# Altium PCB make-urine-white.PcbDoc
Units mm, origin at the board's own origin, x right, y up, seen from the top; angles counter-clockwise.
Board outline 38 x 33 mm, 2 copper layers (Top Layer, Bottom Layer); 31 components, 19 nets, 103 pads, 75 vias.
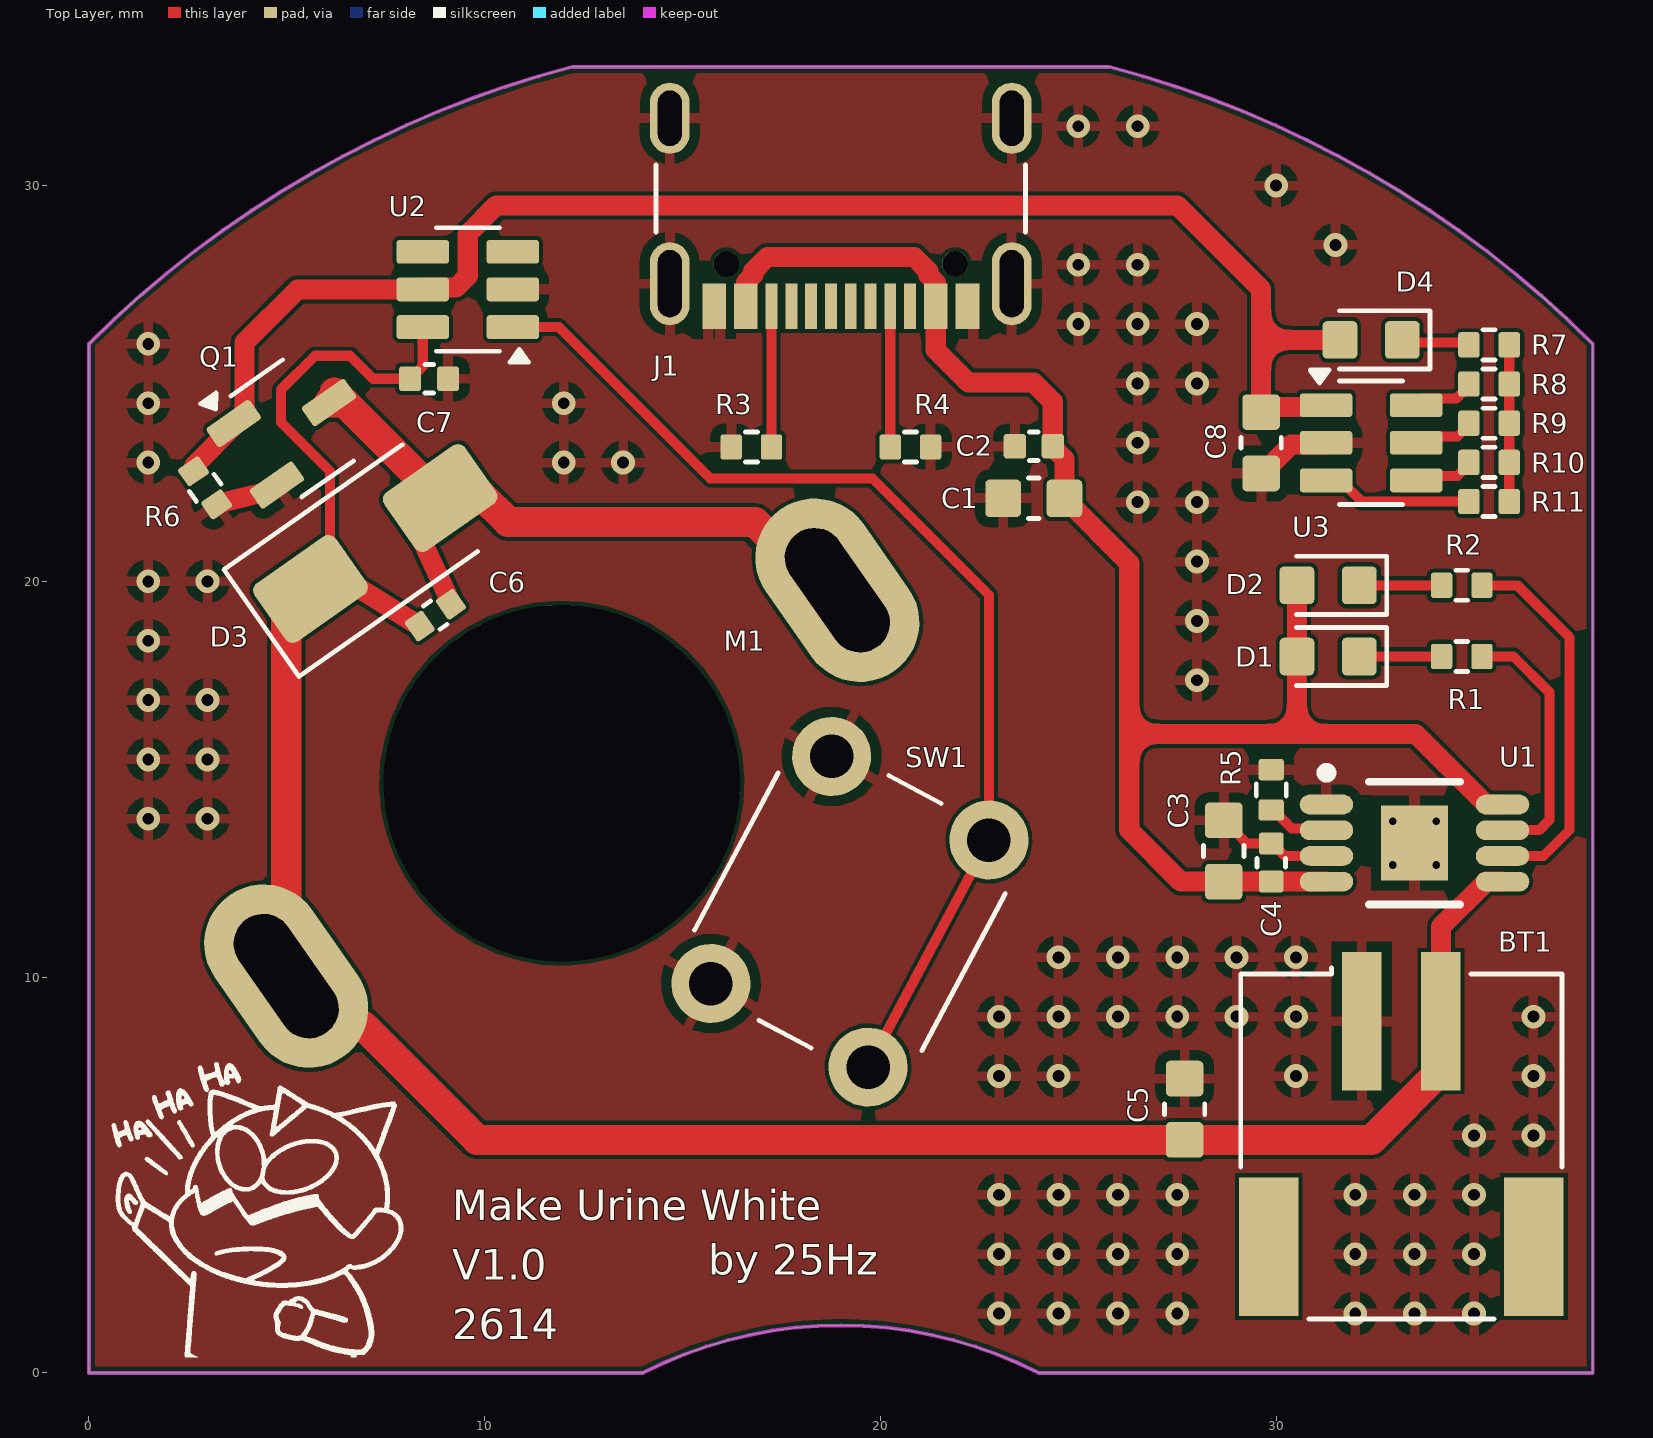
[diagram p0: Top Layer view]
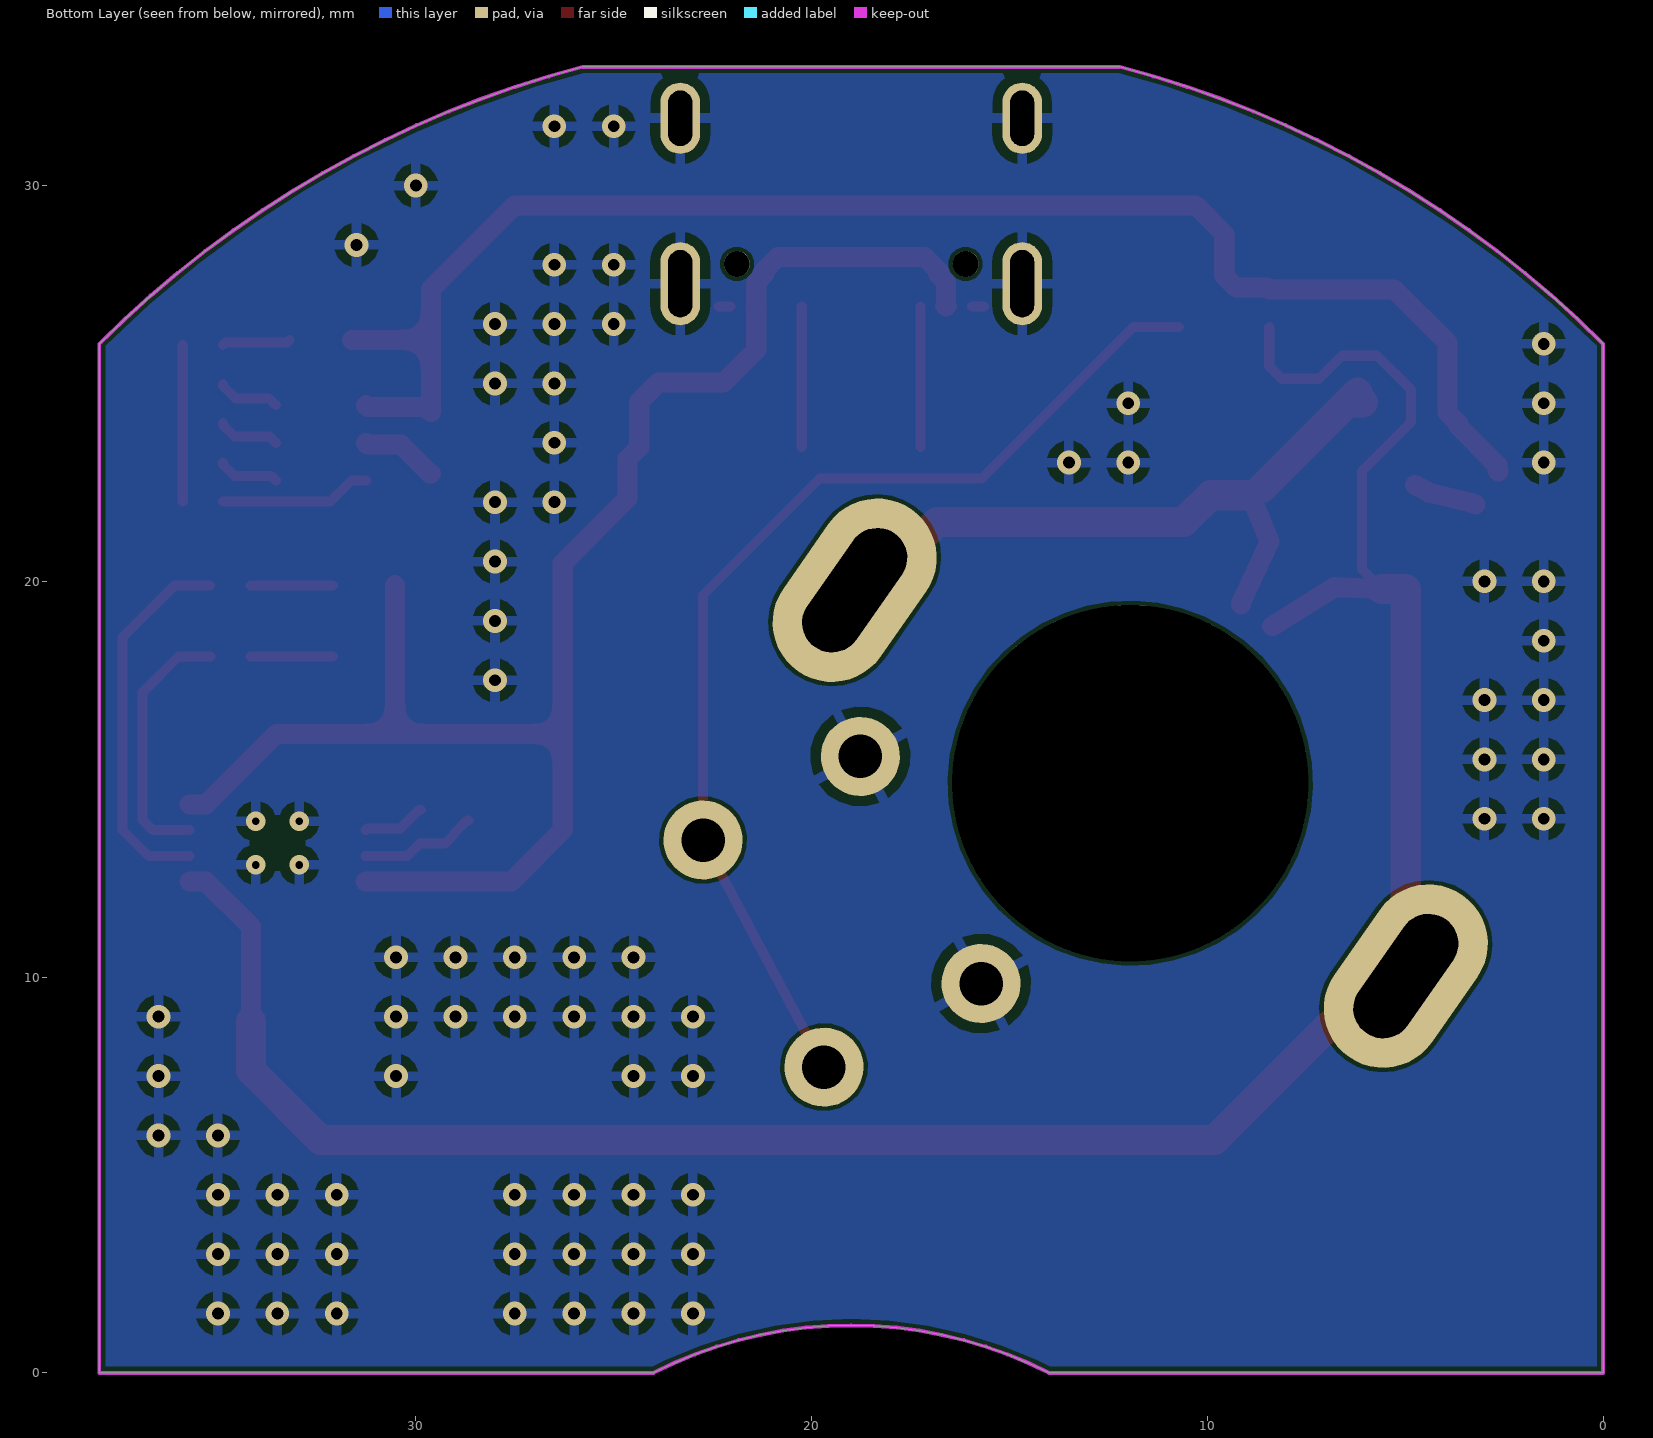
[diagram p1: Bottom Layer view, seen from below]
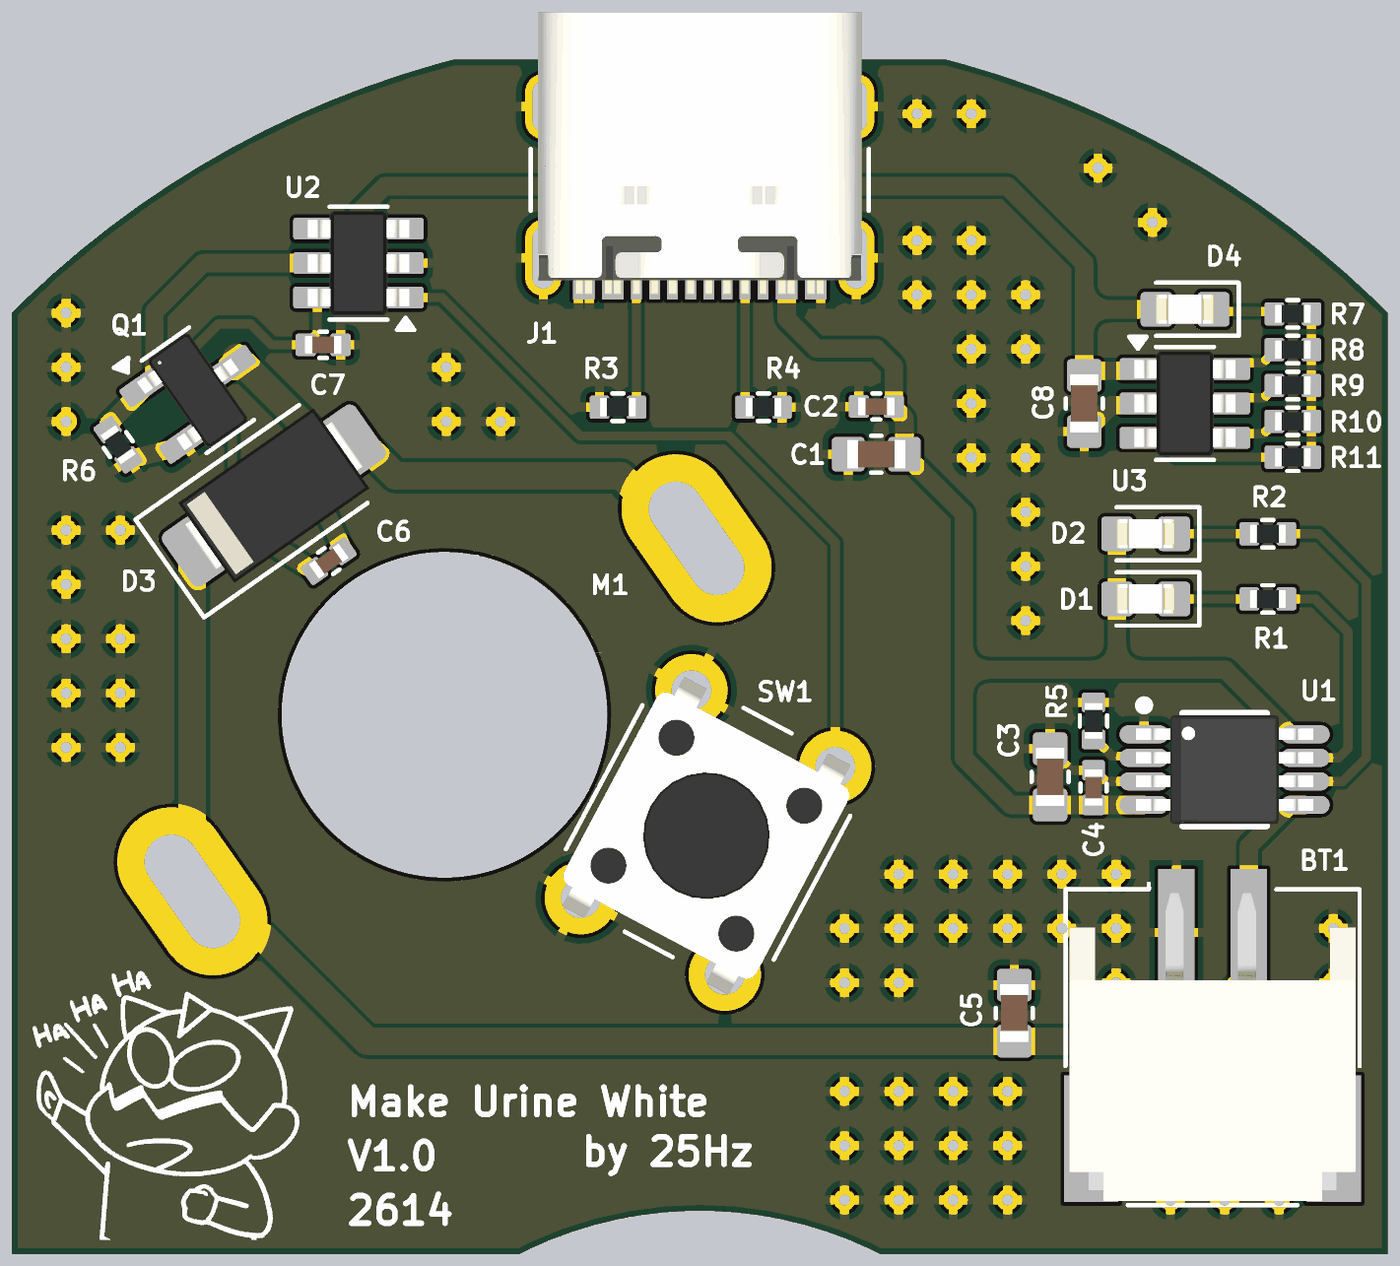
[diagram p2: 3D render of the assembled board from above, using the file's embedded part models]

## Layer stack, top to bottom
Top Solder: solder mask 0.0102, Solder Resist, Dk 3.5
Top Layer: signal copper 0.0356
Dielectric 1: dielectric 0.32, FR-4, Dk 4.8
Bottom Layer: signal copper 0.0356
Bottom Solder: solder mask 0.0102, Solder Resist, Dk 3.5

## Board outline
0,0 0,26 cw(c19,7) 12.218,33 25.782,33 cw(c19,7) 38,26 38,0 24,0 ccw(c19,-9.798) 14,0

## Design rules (kind name [scope] priority, off if disabled: settings)
Clearance [All] p1: gap=0.1 ignorepadtopadclearanceinfootprint=FALSE
HoleSize [All] p1: absolutevalues=TRUE maxlimit=10 minlimit=0.025 maxpercent=80.000 minpercent=20.000
MinimumSolderMaskSliver [All] p1: minsoldermaskwidth=0.01
PolygonConnect [All] p1: connectstyle=Relief reliefconductorwidth=0.254 reliefentries=4 polygonreliefangle="90 Angle" airgapwidth=0.254
RoutingVias [All] p1: holewidth=0.711 width=1.27 viastyle="Through Hole" minholewidth=0.711 minwidth=1.27 maxholewidth=0.711 maxwidth=1.27
SilkToSolderMaskClearance [IsPad] p1: minsilkscreentomaskgap=0.01 clearancetoexposedcopper=TRUE
SolderMaskExpansion [All] p1: expansion=0.102 istentingtop=FALSE
SupplyNets "Schematic Supply Nets_2" [InNet('GND')] p1: voltage=0.000
SupplyNets "Schematic Supply Nets_1" [InNet('VBAT')] p2: voltage=0.000
SupplyNets "Schematic Supply Nets" [InNet('VBUS')] p3: voltage=0.000
Width [All] p1: maxlimit=0.762 minlimit=0.127 preferedwidth=0.254
27 further rules are at their usual default settings.

## Components (designator, comment, footprint, x,y, rotation, side; value= is the part's Value field where it differs from the comment)
BT1 "Battery_Cell" WAFER-PH2.0-2PWB 32.163,8.89 r0 top
C1 "4.7uF" C_0603_1608Metric 23.876,22.098 r180 top
C2 "100nF" C_0402_1005Metric 23.876,23.415 r180 top
C3 "4.7uF" C_0603_1608Metric 28.676,13.187 r90 top
C4 "100nF" C_0402_1005Metric 29.876,12.892 r90 top
C5 "10uF" C_0603_1608Metric 27.686,6.662 r90 top
C6 "100nF" C_0402_1005Metric 8.754,19.146 r35 top
C7 "100nF" C_0402_1005Metric 8.599,25.119 r0 top
C8 "1uF" C_0603_1608Metric 29.62,23.5 r270 top
D1 "RED" LED_0603_1608Metric 31.313,18.1 r180 top
D2 "GREEN" LED_0603_1608Metric 31.312,19.9 r180 top
D3 "SS34" D_SMA 7.239,20.955 r35 top
D4 "RED" LED_0603_1608Metric 32.4,26.1 r180 top
J1 "USB_C_Receptacle_USB2.0_16P" USB_C_Receptacle_GCT_USB4105-xx-A_16P_TopMnt_Horizontal 19,30.625 r180 top
M1 "Motor_DC" Motor-HJD-3.7V-500mA 4.987,10.025 r35 top
Q1 "AO3400" SOT-23-3 5.138,23.862 r35 top
R1 "1K" R_0402_1005Metric 34.69,18.1 r0 top
R2 "1K" R_0402_1005Metric 34.69,19.9 r0 top
R3 "5.1K" R_0402_1005Metric 16.74,23.395 r180 top
R4 "5.1K" R_0402_1005Metric 20.76,23.395 r0 top
R5 "5.1K" R_0402_1005Metric 29.876,14.732 r90 top
R6 "DNP" R_0402_1005Metric 2.938,22.362 r305 top
R7 "330R" R_0402_1005Metric 35.38,25.975 r180 top
R8 "DNP" R_0402_1005Metric 35.38,24.985 r0 top
R9 "DNP" R_0402_1005Metric 35.38,23.995 r0 top
R10 "0R" R_0402_1005Metric 35.38,23.005 r0 top
R11 "DNP" R_0402_1005Metric 35.38,22.015 r0 top
SW1 "SW_SPST" SW_PUSH_6mm_H5mm 19.23,11.65 r62 top
U1 "TP4056" EMSOP-8-1EP_3x3mm_P0.65mm_EP1.7x1.9mm 33.496,13.387 r0 top
U2 "GEK100_00" SOT-23-6 9.575,27.375 r180 top
U3 "HX70A" SOT-23-6 32.4,23.5 r0 top

## Footprints (in the part's own frame and the unit in brackets; to place one, negate y for a bottom-side part, rotate by r counter-clockwise, add the part's x,y. Pads: shape width x height; smd on the part's side, far side on the other; paste and mask are expansions set on the pad)
C_0402_1005Metric [mm]
  rrect25% 0.56x0.62 smd: 1(-0.48,0) 2(0.48,0)
  silkscreen extent -0.11,-0.36 0.11,0.36, body extent -0.5,-0.25 0.5,0.25, height 0.5
C_0603_1608Metric [mm]
  rrect25% 0.9x0.95 smd: 1(-0.775,0) 2(0.775,0)
  silkscreen extent -0.14,-0.51 0.14,0.51, body extent -0.8,-0.4 0.8,0.4, height 0.8
D_SMA [mm]
  rrect25% 2.5x1.8 smd: 1(-2,0) 2(2,0)
  silkscreen extent -3.51,-1.65 2,1.65, body extent -2.5,-1.35 2.5,1.35, height 2.22
EMSOP-8-1EP_3x3mm_P0.65mm_EP1.7x1.9mm [mm]
  oval 1.35x0.5 smd: 1(-2.225,0.975) 2(-2.225,0.325) 3(-2.225,-0.325) 4(-2.225,-0.975) 5(2.225,-0.975) 6(2.225,-0.325) 7(2.225,0.325) 8(2.225,0.975)
  rect 1.7x1.9 smd: 9(0,0)
  silkscreen extent -2.35,-1.55 1.15,1.9, body extent -2.45,-1.5 2.45,1.5, height 1.1
LED_0603_1608Metric [mm]
  rrect25% 0.875x0.95 smd: 1(-0.787,0) 2(0.787,0)
  silkscreen extent -1.49,-0.74 0.8,0.74, body extent -0.8,-0.4 0.8,0.4, height 1.1
Motor-HJD-3.7V-500mA [mm] "荣事达桶装水电动抽水器电机"
  oval 3x5 hole 1.5 slot 3.5 at 90 deg: 1(0,0) 2(17,0)
  round 9 hole 9 unplated: ""(8.5,0)
R_0402_1005Metric [mm]
  rrect25% 0.54x0.64 smd: 1(-0.51,0) 2(0.51,0)
  silkscreen extent -0.15,-0.38 0.15,0.38, body extent -0.5,-0.25 0.5,0.25, height 0.35
SOT-23-3 [mm]
  rrect25% 1.325x0.6 smd: 1(-1.138,0.95) 2(-1.138,-0.95) 3(1.137,0)
  silkscreen extent -1.54,-1.56 0.8,1.84, body extent -1.25,-1.5 1.25,1.5, height 1.2
SOT-23-6 [mm]
  rrect25% 1.325x0.6 smd: 1(-1.138,0.95) 2(-1.138,0) 3(-1.138,-0.95) 4(1.138,-0.95) 5(1.138,0) 6(1.138,0.95)
  silkscreen extent -1.54,-1.56 0.8,1.84, body extent -1.4,-1.45 1.4,1.45, height 1.55
SW_PUSH_6mm_H5mm [mm]
  round 2 hole 1.1: 1(-3.25,2.25) 1(3.25,2.25) 2(-3.25,-2.25) 2(3.25,-2.25)
  silkscreen extent -3.5,-3.25 3.5,3.25, body extent -3.69,-3 3.49,3, height 5
USB_C_Receptacle_GCT_USB4105-xx-A_16P_TopMnt_Horizontal [mm]
  rect 0.3x1.15 smd: A1(-3.35,3.68) A4(-2.55,3.68) A5(-1.25,3.68) A6(-0.25,3.68) A7(0.25,3.68) A8(1.25,3.68) A9(2.55,3.68) A12(3.35,3.68) B1(3.05,3.68) B4(2.25,3.68) B5(1.75,3.68) B6(0.75,3.68) B7(-0.75,3.68) B8(-1.75,3.68) B9(-2.25,3.68) B12(-3.05,3.68)
  oval 1x2.1 hole 0.6 slot 1.7 at 90 deg: S1(-4.32,3.105) S1(4.32,3.105)
  oval 1x1.8 hole 0.6 slot 1.4 at 90 deg: S1(-4.32,-1.075) S1(4.32,-1.075)
  round 0.65 hole 0.65 unplated: ""(-2.89,2.605) ""(2.89,2.605)
  silkscreen extent -4.67,0.1 4.67,1.8, body extent -4.47,-3.67 4.47,4.11, height 3.31
WAFER-PH2.0-2PWB [mm]
  rect 1x3.5 smd: 1(0,0) 2(2,0)
  rect 1.5x3.5 smd: ""(-2.35,-5.7) ""(4.35,-5.7)
  silkscreen extent -3.06,-7.53 5.06,1.35, body extent -2.95,-7.42 4.95,1.08, height 5.6

## Part data
BT1: "Single-cell battery"
C1 C2 C3 C4 C5 C6 C7 C8: library part C, "Unpolarized capacitor"
D1 D2 D4: library part LED, "Light emitting diode"
D3: library part D, "diode"
J1: "USB 2.0-only 16P Type-C Receptacle connector"
M1: "DC Motor"
Q1: library part Q_NMOS_GSD, "N-MOSFET transistor, gate/source/drain"
R1 R2 R3 R4 R5 R6 R7 R8 R9 R10 R11: library part R, "Resistor"
SW1: "Single Pole Single Throw (SPST) switch"
U1: "1A Standalone Linear Li-ion/LiPo single-cell battery charger, 4.2V ±1% charge voltage, VCC = 4.0..8.0V, ESOP-8, EMSOP-8"
U2: library part GEK100_xx, "Push-button power controller, hardware on/off, SOT-23-6"
U3: "4-level battery voltage indicator for single-cell Li-ion, thresholds at 3.1V/3.5V/3.64V/3.8V, SOT-23-6"

## Via types
v1: diameter 0.6, hole 0.3, Top Layer to Bottom Layer, 71 vias
v2: diameter 0.5, hole 0.2, Top Layer to Bottom Layer, 4 vias

## Nets (pads, with @x,y where several pads share a name; then routed paths per layer and width w, separated by ;. In a path a pad name is that pad's centre, name@x,y a point inside that pad or via, vN(x,y) a via of type N, cw(c..) or ccw(c..) an arc to the next point about the centre after c; other vN are vias at no path point)
GND: BT1.1 C1.2 C2.2 C3.2 C4.2 C5.2 C7.2 C8.2 J1.A1 J1.A12 J1.B1 J1.B12 J1.S1 Q1.2 R3.2 R4.2 R5.2 R6.2 SW1.1 U1.1 U1.3 U1.9 U2.2 U3.2 | length 7.1
  Top Layer w0.254: J1.A12 J1.B1 ; J1.B12 J1.A1 ; C3.2 28.701,13.962 29.024,13.639 29.024,13.614 29.266,13.372 C4.2 ; C4.2@29.906,13.372 C4.2@30.059,13.219 ; C4.2@30.059,13.218 30.215,13.062 U1.3
  Top Layer w0.508: R6.2 3.294,21.969 4.39,22.235 Q1.2 ; C8.2 29.645,22.725 30.374,23.454 31.217,23.454 U3.2
  other v1: 23,1.5 24.5,1.5 26,1.5 27.5,1.5 32,1.5 33.5,1.5 35,1.5 23,3 24.5,3 26,3 27.5,3 32,3 33.5,3 35,3 23,4.5 24.5,4.5 26,4.5 27.5,4.5 32,4.5 33.5,4.5 35,4.5 35,6 36.5,6 23,7.5 24.5,7.5 30.5,7.5 36.5,7.5 23,9 24.5,9 26,9 27.5,9 29,9 30.5,9 36.5,9 24.5,10.5 26,10.5 27.5,10.5 29,10.5 30.5,10.5 1.5,14 3,14 1.5,15.5 3,15.5 1.5,17 3,17 28,17.5 1.5,18.5 28,19 1.5,20 3,20 28,20.5 26.5,22 28,22 1.5,23 12,23 13.5,23 26.5,23.5 1.5,24.5 12,24.5 26.5,25 28,25 1.5,26 25,26.5 26.5,26.5 28,26.5 25,28 26.5,28 31.5,28.5 30,30 25,31.5 26.5,31.5
  other v2: 32.946,12.837 34.046,12.837 32.946,13.937 34.046,13.937
NetC6_2: C6.2 D3.2 M1.2 Q1.3 | length 17.7
  Top Layer w0.508: D3.2 8.432,21.002 9.136,19.482 C6.2
  Top Layer w0.762: Q1.3 Q1.3@6.465,24.514 ; Q1.3@6.211,24.768 Q1.3@6.465,24.514 ; D3.2@8.623,22.356 Q1.3@6.465,24.514 ; D3.2@8.949,22.174 9.92,22.174 10.594,21.5 16.828,21.5 18.553,19.776 M1.2
NetC8_1: C8.1 D4.2 Q1.1 R6.1 U2.5 U3.1 | length 39.2
  Top Layer w0.508: R6.1 2.674,22.808 2.674,22.936 3.661,23.924 Q1.1 3.938,24.264 3.938,26.038 5.275,27.375 U2.5 8.483,27.421 9.278,27.421 9.575,27.719 9.575,28.777 10.298,29.5 27.5,29.5 29.62,27.38 29.62,26.1 ; C8.1 29.749,24.404 31.217,24.404 U3.1 ; C8.1@29.62,24.3 29.62,26.1 ; D4.2 29.62,26.1
NetD1_1: D1.1 R1.1 | length 2.1
  Top Layer w0.254: D1.1 R1.1
NetD2_1: D2.1 R2.1 | length 2.1
  Top Layer w0.254: D2.1 R2.1
NetD4_1: D4.1 R7.2 | length 1.7
  Top Layer w0.254: D4.1 33.25,26.037 34.808,26.037 R7.2
NetJ1_A5: J1.A5 R4.1 | length 3.6
  Top Layer w0.254: R4.1 J1.A5
NetJ1_B5: J1.B5 R3.1 | length 3.6
  Top Layer w0.254: R3.1 J1.B5
NetR1_2: R1.2 U1.7 | length 6.6
  Top Layer w0.254: R1.2@35.19,18.1 R1.2 36,18.1 36.903,17.197 36.903,13.97 36.645,13.712 U1.7
NetR2_2: R2.2 U1.6 | length 9.6
  Top Layer w0.254: R2.2 36.095,19.9 37.411,18.584 37.411,13.716 36.757,13.062 U1.6
NetR5_1: R5.1 U1.2 | length 1.6
  Top Layer w0.254: R5.1 29.926,14.222 30.389,13.759 31.224,13.759 U1.2
NetR7_1: R7.1 R8.2 R9.2 R10.2 R11.2 | length 4
  Top Layer w0.254: R11.2 R10.2 R9.2 R8.2 R7.1
NetR8_1: R8.1 U3.6 | length 1.6
  Top Layer w0.254: U3.6 33.711,24.623 34.558,24.623 34.87,24.935 R8.1
NetR9_1: R9.1 U3.5 | length 1.6
  Top Layer w0.254: U3.5 33.694,23.656 34.582,23.656 34.87,23.945 R9.1
NetR10_1: R10.1 U3.4 | length 1.5
  Top Layer w0.254: U3.4 33.654,22.666 34.582,22.666 34.87,22.955 R10.1
NetR11_1: R11.1 U3.3 | length 3.8
  Top Layer w0.254: U3.3 31.625,22.55 32.16,22.015 R11.1
NetSW1_2: SW1.2 U2.1 | length 27.5
  Top Layer w0.254: U2.1 11.875,26.425 15.7,22.6 19.8,22.6 22.742,19.658 22.742,13.463 SW1.2@19.691,7.724
VBAT: BT1.2 C5.1 C6.1 C7.1 D3.1 M1.1 U1.5 U2.6 | length 61.8
  Top Layer w0.254: D3.1 6.091,20.298 6.091,22.787 4.851,24.026 4.851,24.839 5.713,25.7 6.6,25.7 7.181,25.119 C7.1 8.437,25.438 U2.6
  Top Layer w0.508: D3.1 6.787,19.85 8.307,18.902 C6.1 ; BT1.2 34.163,11.271 35.304,12.412 U1.5
  Top Layer w0.762: D3.1 4.987,19.808 M1.1 6.234,8.778 6.922,8.778 9.813,5.887 C5.1 32.41,5.887 34.163,7.64 BT1.2
VBUS: C1.1 C2.1 C3.1 C4.1 D1.2 D2.2 J1.A4 J1.A9 J1.B4 J1.B9 U1.4 U1.8 | length 42.9
  Top Layer w0.254: J1.A9 16.6,26.945 J1.B4 ; J1.B9 21.4,26.945 J1.A4
  Top Layer w0.508: J1.B4@16.6,26.945 16.6,27.55 16.789,27.739 16.789,27.838 17.145,28.194 20.855,28.194 21.211,27.838 21.211,27.739 21.4,27.55 21.4,26.945 21.4,25.844 22.225,25.019 23.876,25.019 24.356,24.539 C2.1 24.356,23.385 24.651,23.09 C1.1 26.289,20.46 26.289,16.144 ; D2.2 D1.2 30.525,16.144 ; U1.4 C4.1 C3.1 27.593,12.412 26.289,13.716 26.289,16.144 ; U1.8 35.304,14.362 33.522,16.144 30.525,16.144 ; 26.289,16.144 30.525,16.144
pads on no net: BT1. J1. J1.A6 J1.A7 J1.A8 J1.B6 J1.B7 J1.B8 M1. U2.3 U2.4

## Polygon pours and split planes (outlines as drawn)
GND on Top Layer "GND_L01_P000" (solid, pour order 0): 0,0 0,26 cw(c19,7) 12.218,33 25.782,33 cw(c19,7) 38,26 38,0 24,0 ccw(c19,-9.798) 14,0
GND on Bottom Layer "GND_L02_P001" (solid, pour order 1): 0,0 0,26 cw(c19,7) 12.218,33 25.782,33 cw(c19,7) 38,26 38,0 24,0 ccw(c19,-9.798) 14,0

## Keep-outs
Keep-Out Layer:
  the board outline again, w0.1

## Silkscreen, mask and mechanical layers (free items; w line width, h text height)
Top Overlay:
  drawing of 10 lines, arcs and shapes, not listed
  text "Make Urine White" at 9.177,3.852 h0.76
  text "by 25Hz" at 15.652,2.479 h0.76
  text "V1.0" at 9.177,2.352 h0.76
  text "2614" at 9.177,0.852 h0.76